# Altium PCB PCB1.PcbDoc (part 2 of 3)
Units mil, origin at the board's own origin, x right, y up, seen from the top; angles counter-clockwise.
Board outline 2780 x 2325 mil, 2 copper layers (Top Layer, Bottom Layer); 78 components, 66 nets, 284 pads, 83 vias.
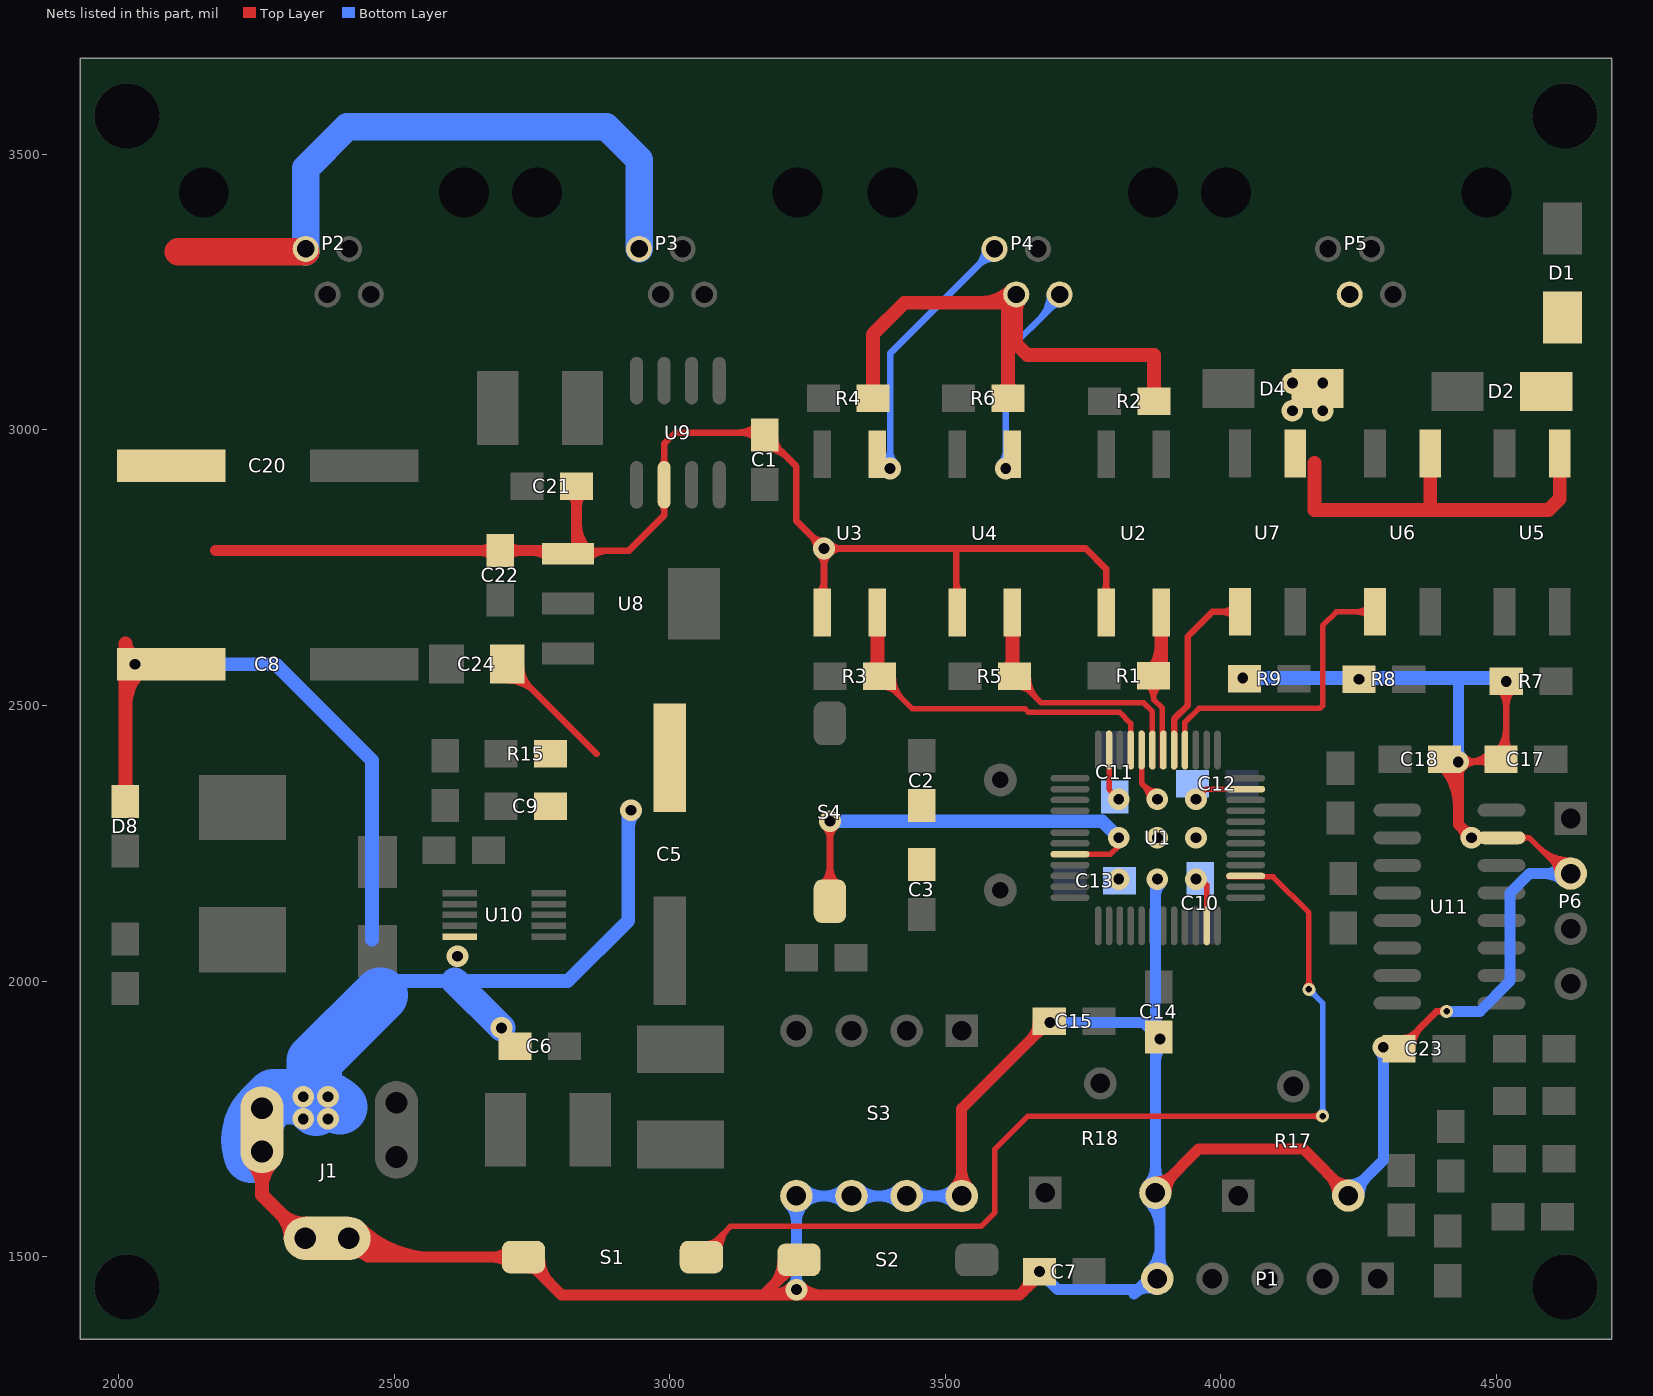
[diagram p2: the nets of this part, all layers, seen from the top]

## Via types
v1: diameter 39.37, hole 19.68, Top Layer to Bottom Layer, 56 vias
v2: diameter 23.62, hole 11.81, Top Layer to Bottom Layer, 18 vias
v3: diameter 19.68, hole 11.81, Top Layer to Bottom Layer, 8 vias
v4: diameter 23.62, hole 11.81, Top Layer to Bottom Layer, tented bottom, 1 vias

## Nets (pads, with @x,y where several pads share a name; then routed paths per layer and width w, separated by ;. In a path a pad name is that pad's centre, name@x,y a point inside that pad or via, vN(x,y) a via of type N, cw(c..) or ccw(c..) an arc to the next point about the centre after c; other vN are vias at no path point) (continued)
GND: C1.2 C2.2 C3.2 C5.2 C6.1 C7.1 C8.2 C9.1 C10.2 C11.2 C12.2 C13.2 C14.2 C15.2 C17.2 C18.2 C20.2 C21.2 C22.2 C23.2 C24.2 D8.2 J1.2 J1.2A J1.2B J1.3 J1.3A J1.3B P1.5 P2.2 P3.2 P6.2 R7.1 R8.1 R9.1 R15.1 R17.2 R18.2 S1.2 S2.2 S3.5 S3.6 S3.7 S3.8 S4.2 U1.8 U1.23 U1.35 U1.44 U1.47 U2.3 U3.3 U4.3 U8.1 U9.2 U10.5 U11.15 | length 31833.9
  Top Layer w10: U1.8@3726.41,2230.16 3799.84,2230.16 v1@3815,2245.32 ; U1.47@3797.28,2450 3797.28,2347.72 v1(3815,2330) ; U1.44@3856.33,2450 3856.33,2358.67 v1(3885,2330) ; v1(3955,2330) 3973.27,2348.27 U1.35@4075,2348.27 ; U1.23@3974.44,2100.24 3974.44,2174.44 ; C18.2@4431.52,2397.31 C17.2@4533.86,2397.31 ; U11.15@4509.49,2260 4560,2260 P6.2@4615,2205 ; 3859.93,2355.07 cw(c3834.86,2330) v1@3870.31,2330 ; 3859.93,2355.07 ccw(c3885,2380.14) v1@3885,2344.69 ; 3859.93,2355.07 ccw(c3885,2380.14) v1@3885,2344.69 ; 3859.93,2355.07 cw(c3834.86,2330) v1@3870.31,2330 ; 3859.93,2355.07 ccw(c3885,2380.14) v1@3885,2344.69 ; 3859.93,2355.07 cw(c3834.86,2330) v1@3870.31,2330 ; C18.2@4418.21,2409.76 ccw(c4448.26,2439.8) v1@4448.26,2397.31 ; C18.2@4418.21,2409.76 ccw(c4448.26,2439.8) v1@4448.26,2397.31 ; C18.2@4418.21,2409.76 ccw(c4448.26,2439.8) v1@4448.26,2397.31 ; C18.2@4425.28,2388.55 cw(c4446.45,2367.38) v1@4446.45,2397.31 ; C18.2@4425.28,2388.55 cw(c4446.45,2367.38) v1@4446.45,2397.31 ; C18.2@4425.28,2388.55 cw(c4446.45,2367.38) v1@4446.45,2397.31 ; C18.2@4425.28,2416.83 ccw(c4472.4,2463.95) 4472.4,2397.31 ; C18.2@4425.28,2416.83 ccw(c4472.4,2463.95) 4472.4,2397.31 ; C18.2@4425.28,2416.83 ccw(c4472.4,2463.95) 4472.4,2397.31 ; v1@4441.53,2387.3 cw(c4465.69,2363.14) 4465.69,2397.31 ; v1@4441.53,2387.3 cw(c4465.69,2363.14) 4465.69,2397.31 ; v1@4441.53,2387.3 cw(c4465.69,2363.14) 4465.69,2397.31 ; v1@4441.53,2408.07 ccw(c4467.5,2434.04) 4467.5,2397.31 ; v1@4441.53,2408.07 ccw(c4467.5,2434.04) 4467.5,2397.31 ; v1@4441.53,2408.07 ccw(c4467.5,2434.04) 4467.5,2397.31 ; v1@4443.5,2397.31 ccw(c4443.5,2462.67) C17.2@4489.72,2416.45 ; v1@4443.5,2397.31 ccw(c4443.5,2462.67) C17.2@4489.72,2416.45 ; v1@4443.5,2397.31 ccw(c4443.5,2462.67) C17.2@4489.72,2416.45 ; 4467.65,2397.31 cw(c4467.65,2366.1) C17.2@4489.72,2388.17 ; 4467.65,2397.31 ccw(c4467.65,2438.53) C17.2@4496.79,2409.38 ; 4467.65,2397.31 ccw(c4467.65,2438.53) C17.2@4496.79,2409.38 ; 4467.65,2397.31 cw(c4467.65,2366.1) C17.2@4489.72,2388.17 ; 4467.65,2397.31 ccw(c4467.65,2438.53) C17.2@4496.79,2409.38 ; 4467.65,2397.31 cw(c4467.65,2366.1) C17.2@4489.72,2388.17 ; U11.15@4545.8,2255.18 cw(c4557.43,2243.56) 4557.43,2260 ; U11.15@4545.8,2255.18 cw(c4557.43,2243.56) 4557.43,2260 ; U11.15@4545.8,2255.18 cw(c4557.43,2243.56) 4557.43,2260 ; U11.15@4545.8,2264.82 ccw(c4557.43,2276.44) 4557.43,2260 ; U11.15@4545.8,2264.82 ccw(c4557.43,2276.44) 4557.43,2260 ; U11.15@4545.8,2264.82 ccw(c4557.43,2276.44) 4557.43,2260 ; 4576.06,2243.94 ccw(c4635,2302.88) P6.2@4635,2219.53 ; 4576.06,2243.94 ccw(c4635,2302.88) P6.2@4635,2219.53 ; 4576.06,2243.94 ccw(c4635,2302.88) P6.2@4635,2219.53 ; 4593.13,2226.87 ccw(c4635,2268.74) P6.2@4635,2209.53 ; 4593.13,2226.87 ccw(c4635,2268.74) P6.2@4635,2209.53 ; 4593.13,2226.87 ccw(c4635,2268.74) P6.2@4635,2209.53 ; 4600.2,2219.8 cw(c4575.4,2195) P6.2@4610.47,2195 ; 4600.2,2219.8 cw(c4575.4,2195) P6.2@4610.47,2195 ; 4600.2,2219.8 cw(c4575.4,2195) P6.2@4610.47,2195
  Top Layer w12: C24.2@2705.12,2575 2867.81,2412.31 ; U8.1@2821.42,2781.14 2926.14,2781.14 2990,2845 U9.2@2990,2900.51 2990,2975 3010,2995 3168.45,2995 C1.2@3172.31,2991.14 3230,2933.45 3230,2835 v1(3280,2785) ; S4.2@3270.88,2149.78 S4.2@3301.8,2118.86 ; U3.3@3280,2671.6 v1(3280,2785) ; S4.2@3290.88,2144.78 v1(3290.88,2290) v1@3290.88,2295.88 ; U4.3@3520,2670.6 3520,2785 ; U2.3@3792,2668.6 3792,2748 3755,2785 3520,2785 ; C23.2@4323.86,1877.31 4391.55,1945 v2(4410,1945) ; C17.2@4518.14,2411.6 v1(4518.14,2543.69) ; C24.2@2705.12,2545.57 cw(c2705.12,2474.51) 2755.36,2524.75 ; C24.2@2705.12,2545.57 cw(c2705.12,2474.51) 2755.36,2524.75 ; C24.2@2705.12,2545.57 cw(c2705.12,2474.51) 2755.36,2524.75 ; C24.2@2705.12,2557.57 cw(c2705.12,2515.48) C24.2@2734.88,2545.24 ; C24.2@2705.12,2557.57 cw(c2705.12,2515.48) C24.2@2734.88,2545.24 ; C24.2@2705.12,2557.57 cw(c2705.12,2515.48) C24.2@2734.88,2545.24 ; C24.2@2730.61,2571.06 ccw(c2782.66,2571.06) 2745.86,2534.26 ; C24.2@2730.61,2571.06 ccw(c2782.66,2571.06) 2745.86,2534.26 ; C24.2@2730.61,2571.06 ccw(c2782.66,2571.06) 2745.86,2534.26 ; U8.1@2853.06,2765.87 cw(c2889.92,2729.02) 2889.92,2781.14 ; U8.1@2853.06,2765.87 cw(c2889.92,2729.02) 2889.92,2781.14 ; U8.1@2853.06,2765.87 cw(c2889.92,2729.02) 2889.92,2781.14 ; U8.1@2853.06,2785.23 ccw(c2862.93,2795.09) U8.1@2862.93,2781.14 ; U8.1@2853.06,2785.23 ccw(c2862.93,2795.09) U8.1@2862.93,2781.14 ; U8.1@2853.06,2785.23 ccw(c2862.93,2795.09) U8.1@2862.93,2781.14 ; U9.2@2985.89,2864.91 cw(c2975.97,2854.99) 2990,2854.99 ; U9.2@2985.89,2864.91 cw(c2975.97,2854.99) 2990,2854.99 ; U9.2@2985.89,2864.91 cw(c2975.97,2854.99) 2990,2854.99 ; U9.2@2985.89,2936.12 ccw(c2975.97,2946.04) 2990,2946.04 ; U9.2@2985.89,2936.12 ccw(c2975.97,2946.04) 2990,2946.04 ; U9.2@2985.89,2936.12 ccw(c2975.97,2946.04) 2990,2946.04 ; 2990,2854.99 cw(c3004.03,2854.99) U9.2@2994.11,2864.91 ; 2990,2854.99 cw(c3004.03,2854.99) U9.2@2994.11,2864.91 ; 2990,2854.99 cw(c3004.03,2854.99) U9.2@2994.11,2864.91 ; 2990,2946.04 ccw(c3004.03,2946.04) U9.2@2994.11,2936.12 ; 2990,2946.04 ccw(c3004.03,2946.04) U9.2@2994.11,2936.12 ; 2990,2946.04 ccw(c3004.03,2946.04) U9.2@2994.11,2936.12 ; 3123.69,2995 ccw(c3123.69,3044.77) C1.2@3158.88,3009.58 ; 3123.69,2995 ccw(c3123.69,3044.77) C1.2@3158.88,3009.58 ; 3123.69,2995 ccw(c3123.69,3044.77) C1.2@3158.88,3009.58 ; 3129.2,2995 cw(c3129.2,2953.03) C1.2@3158.88,2982.71 ; 3129.2,2995 cw(c3129.2,2953.03) C1.2@3158.88,2982.71 ; 3129.2,2995 cw(c3129.2,2953.03) C1.2@3158.88,2982.71 ; C1.2@3172.31,2967.14 cw(c3172.31,2909.2) 3213.28,2950.17 ; C1.2@3172.31,2967.14 cw(c3172.31,2909.2) 3213.28,2950.17 ; C1.2@3172.31,2967.14 cw(c3172.31,2909.2) 3213.28,2950.17 ; C1.2@3172.31,2979.14 cw(c3172.31,2950.17) C1.2@3192.8,2970.66 ; C1.2@3172.31,2979.14 cw(c3172.31,2950.17) C1.2@3192.8,2970.66 ; C1.2@3172.31,2979.14 cw(c3172.31,2950.17) C1.2@3192.8,2970.66 ; C1.2@3191.31,2986.14 ccw(c3225.11,2986.14) 3201.21,2962.24 ; C1.2@3191.31,2986.14 ccw(c3225.11,2986.14) 3201.21,2962.24 ; C1.2@3191.31,2986.14 ccw(c3225.11,2986.14) 3201.21,2962.24 ; 3256.64,2808.36 cw(c3233.28,2785) v1@3266.32,2785 ; 3256.64,2808.36 ccw(c3280,2831.72) v1@3280,2798.68 ; 3256.64,2808.36 ccw(c3280,2831.72) v1@3280,2798.68 ; 3256.64,2808.36 cw(c3233.28,2785) v1@3266.32,2785 ; 3256.64,2808.36 ccw(c3280,2831.72) v1@3280,2798.68 ; 3256.64,2808.36 cw(c3233.28,2785) v1@3266.32,2785 ; U3.3@3270.11,2703.05 ccw(c3246.22,2726.93) 3280,2726.93 ; U3.3@3270.11,2703.05 ccw(c3246.22,2726.93) 3280,2726.93 ; U3.3@3270.11,2703.05 ccw(c3246.22,2726.93) 3280,2726.93 ; v1@3270.32,2775.32 cw(c3246.96,2751.96) 3280,2751.96 ; v1@3270.32,2775.32 cw(c3246.96,2751.96) 3280,2751.96 ; v1@3270.32,2775.32 cw(c3246.96,2751.96) 3280,2751.96 ; S4.2@3274.25,2171.26 ccw(c3234.08,2211.42) 3290.88,2211.42 ; S4.2@3274.25,2171.26 ccw(c3234.08,2211.42) 3290.88,2211.42 ; S4.2@3274.25,2171.26 ccw(c3234.08,2211.42) 3290.88,2211.42 ; 3280,2712.45 ccw(c3293.29,2712.45) U3.3@3283.89,2703.05 ; 3280,2712.45 ccw(c3293.29,2712.45) U3.3@3283.89,2703.05 ; 3280,2712.45 ccw(c3293.29,2712.45) U3.3@3283.89,2703.05 ; 3280,2751.96 cw(c3313.04,2751.96) v1@3289.68,2775.32 ; 3280,2751.96 cw(c3313.04,2751.96) v1@3289.68,2775.32 ; 3280,2751.96 cw(c3313.04,2751.96) v1@3289.68,2775.32 ; v1(3280,2785) 3520,2785 ; v1@3281.21,2280.32 cw(c3257.84,2256.96) 3290.88,2256.96 ; v1@3281.21,2280.32 cw(c3257.84,2256.96) 3290.88,2256.96 ; v1@3281.21,2280.32 cw(c3257.84,2256.96) 3290.88,2256.96 ; v1@3289.68,2775.32 cw(c3313.04,2751.96) 3313.04,2785 ; v1@3289.68,2775.32 cw(c3313.04,2751.96) 3313.04,2785 ; v1@3289.68,2775.32 cw(c3313.04,2751.96) 3313.04,2785 ; v1@3289.68,2794.68 ccw(c3313.04,2818.04) 3313.04,2785 ; v1@3289.68,2794.68 ccw(c3313.04,2818.04) 3313.04,2785 ; v1@3289.68,2794.68 ccw(c3313.04,2818.04) 3313.04,2785 ; 3290.88,2211.42 ccw(c3347.68,2211.42) S4.2@3307.52,2171.26 ; 3290.88,2211.42 ccw(c3347.68,2211.42) S4.2@3307.52,2171.26 ; 3290.88,2211.42 ccw(c3347.68,2211.42) S4.2@3307.52,2171.26 ; 3290.88,2256.96 cw(c3323.92,2256.96) v1@3300.56,2280.32 ; 3290.88,2256.96 cw(c3323.92,2256.96) v1@3300.56,2280.32 ; 3290.88,2256.96 cw(c3323.92,2256.96) v1@3300.56,2280.32 ; U4.3@3515.11,2703.05 ccw(c3503.29,2714.86) 3520,2714.86 ; U4.3@3515.11,2703.05 ccw(c3503.29,2714.86) 3520,2714.86 ; U4.3@3515.11,2703.05 ccw(c3503.29,2714.86) 3520,2714.86 ; 3520,2724.52 ccw(c3550.36,2724.52) U4.3@3528.89,2703.05 ; 3520,2724.52 ccw(c3550.36,2724.52) U4.3@3528.89,2703.05 ; 3520,2724.52 ccw(c3550.36,2724.52) U4.3@3528.89,2703.05 ; U2.3@3785.11,2703.05 ccw(c3768.47,2719.69) 3792,2719.69 ; U2.3@3785.11,2703.05 ccw(c3768.47,2719.69) 3792,2719.69 ; U2.3@3785.11,2703.05 ccw(c3768.47,2719.69) 3792,2719.69 ; 3792,2719.69 ccw(c3815.53,2719.69) U2.3@3798.89,2703.05 ; 3792,2719.69 ccw(c3815.53,2719.69) U2.3@3798.89,2703.05 ; 3792,2719.69 ccw(c3815.53,2719.69) U2.3@3798.89,2703.05 ; C23.2@4328.86,1896.31 ccw(c4328.86,1930.11) 4352.76,1906.21 ; C23.2@4328.86,1896.31 ccw(c4328.86,1930.11) 4352.76,1906.21 ; C23.2@4328.86,1896.31 ccw(c4328.86,1930.11) 4352.76,1906.21 ; C23.2@4335.86,1877.31 cw(c4364.83,1877.31) C23.2@4344.34,1897.8 ; C23.2@4335.86,1877.31 cw(c4364.83,1877.31) C23.2@4344.34,1897.8 ; C23.2@4335.86,1877.31 cw(c4364.83,1877.31) C23.2@4344.34,1897.8 ; C23.2@4347.86,1877.31 cw(c4405.8,1877.31) 4364.83,1918.28 ; C23.2@4347.86,1877.31 cw(c4405.8,1877.31) 4364.83,1918.28 ; C23.2@4347.86,1877.31 cw(c4405.8,1877.31) 4364.83,1918.28 ; 4395.97,1945 cw(c4395.97,1930.97) v2@4405.89,1940.89 ; 4395.97,1945 ccw(c4395.97,1959.03) v2@4405.89,1949.11 ; 4395.97,1945 ccw(c4395.97,1959.03) v2@4405.89,1949.11 ; 4395.97,1945 cw(c4395.97,1930.97) v2@4405.89,1940.89 ; 4395.97,1945 ccw(c4395.97,1959.03) v2@4405.89,1949.11 ; 4395.97,1945 cw(c4395.97,1930.97) v2@4405.89,1940.89 ; C17.2@4500.42,2415.75 ccw(c4457.65,2458.52) 4518.14,2458.52 ; C17.2@4500.42,2415.75 ccw(c4457.65,2458.52) 4518.14,2458.52 ; C17.2@4500.42,2415.75 ccw(c4457.65,2458.52) 4518.14,2458.52 ; R7.1@4504.71,2530.25 cw(c4472.27,2497.82) 4518.14,2497.82 ; R7.1@4504.71,2530.25 cw(c4472.27,2497.82) 4518.14,2497.82 ; R7.1@4504.71,2530.25 cw(c4472.27,2497.82) 4518.14,2497.82 ; R7.1@4508.47,2534.01 cw(c4485.1,2510.65) 4518.14,2510.65 ; R7.1@4508.47,2534.01 cw(c4485.1,2510.65) 4518.14,2510.65 ; R7.1@4508.47,2534.01 cw(c4485.1,2510.65) 4518.14,2510.65 ; C17.2@4508.91,2407.26 ccw(c4486.62,2429.55) 4518.14,2429.55 ; C17.2@4508.91,2407.26 ccw(c4486.62,2429.55) 4518.14,2429.55 ; C17.2@4508.91,2407.26 ccw(c4486.62,2429.55) 4518.14,2429.55 ; 4518.14,2437.84 ccw(c4549.39,2437.84) C17.2@4527.29,2415.75 ; 4518.14,2437.84 ccw(c4549.39,2437.84) C17.2@4527.29,2415.75 ; 4518.14,2437.84 ccw(c4549.39,2437.84) C17.2@4527.29,2415.75 ; 4518.14,2497.82 cw(c4564.01,2497.82) R7.1@4531.58,2530.25 ; 4518.14,2497.82 cw(c4564.01,2497.82) R7.1@4531.58,2530.25 ; 4518.14,2497.82 cw(c4564.01,2497.82) R7.1@4531.58,2530.25 ; 4518.14,2510.65 cw(c4551.18,2510.65) R7.1@4527.82,2534.01 ; 4518.14,2510.65 cw(c4551.18,2510.65) R7.1@4527.82,2534.01 ; 4518.14,2510.65 cw(c4551.18,2510.65) R7.1@4527.82,2534.01
  Top Layer w20: 2176.14,2781.14 C22.2@2692.31,2781.14 2821.42,2781.14 2831.14,2790.87 C21.2@2831.14,2897.69 ; J1.3A@2339.02,1533.15 J1.3@2378.39,1533.15 ; S2.2@3234.78,1494.12 3170.66,1430 ; S3.8@3530,1610 3530,1768.45 C15.2@3688.86,1927.31 ; C7.1@3672.69,1467.69 3635,1430 3170.66,1430 ; R18.2@3881.57,1630.75 3895.75,1630.75 3960,1695 4150,1695 R17.2@4232.91,1612.09 ; v1(4431.14,2397.69) 4431.14,2283.86 v1(4455,2260) ; J1.3A@2352.82,1519.34 cw(c2386.16,1486.01) J1.3@2386.16,1533.15 ; J1.3A@2352.82,1519.34 cw(c2386.16,1486.01) J1.3@2386.16,1533.15 ; J1.3A@2352.82,1519.34 cw(c2386.16,1486.01) J1.3@2386.16,1533.15 ; J1.3A@2352.82,1546.96 ccw(c2386.16,1580.29) J1.3@2386.16,1533.15 ; J1.3A@2352.82,1546.96 ccw(c2386.16,1580.29) J1.3@2386.16,1533.15 ; J1.3A@2352.82,1546.96 ccw(c2386.16,1580.29) J1.3@2386.16,1533.15 ; J1.3A@2354.56,1521.33 cw(c2378.38,1503.23) J1.3@2378.39,1533.15 ; J1.3A@2354.56,1521.33 cw(c2378.38,1503.23) J1.3@2378.39,1533.15 ; J1.3A@2354.56,1521.33 cw(c2378.38,1503.23) J1.3@2378.39,1533.15 ; J1.3A@2354.56,1521.33 cw(c2378.38,1503.23) J1.3@2378.39,1533.15 ; J1.3A@2354.56,1521.33 cw(c2378.38,1503.23) J1.3@2378.39,1533.15 ; J1.3A@2354.56,1521.33 cw(c2378.38,1503.23) J1.3@2378.39,1533.15 ; J1.3A@2354.56,1544.97 ccw(c2378.38,1563.07) J1.3@2378.39,1533.15 ; J1.3A@2354.56,1544.97 ccw(c2378.38,1563.07) J1.3@2378.39,1533.15 ; J1.3A@2354.56,1544.97 ccw(c2378.38,1563.07) J1.3@2378.39,1533.15 ; J1.3A@2354.56,1544.97 ccw(c2378.38,1563.07) J1.3@2378.39,1533.15 ; J1.3A@2354.56,1544.97 ccw(c2378.38,1563.07) J1.3@2378.39,1533.15 ; J1.3A@2354.56,1544.97 ccw(c2378.38,1563.07) J1.3@2378.39,1533.15 ; J1.3@2370.61,1533.15 cw(c2370.61,1486.01) J1.3B@2403.95,1519.34 ; J1.3@2370.61,1533.15 ccw(c2370.61,1580.29) J1.3B@2403.95,1546.96 ; J1.3@2370.61,1533.15 ccw(c2370.61,1580.29) J1.3B@2403.95,1546.96 ; J1.3@2370.61,1533.15 cw(c2370.61,1486.01) J1.3B@2403.95,1519.34 ; J1.3@2370.61,1533.15 ccw(c2370.61,1580.29) J1.3B@2403.95,1546.96 ; J1.3@2370.61,1533.15 cw(c2370.61,1486.01) J1.3B@2403.95,1519.34 ; J1.3@2378.39,1533.15 cw(c2378.39,1503.23) J1.3B@2402.21,1521.33 ; J1.3@2378.39,1533.15 ccw(c2378.39,1563.07) J1.3B@2402.21,1544.97 ; J1.3@2378.39,1533.15 cw(c2378.39,1503.23) J1.3B@2402.21,1521.33 ; J1.3@2378.39,1533.15 ccw(c2378.39,1563.07) J1.3B@2402.21,1544.97 ; J1.3@2378.39,1533.15 ccw(c2378.39,1563.07) J1.3B@2402.21,1544.97 ; J1.3@2378.39,1533.15 cw(c2378.39,1503.23) J1.3B@2402.21,1521.33 ; J1.3@2378.39,1533.15 ccw(c2378.39,1563.07) J1.3B@2402.21,1544.97 ; J1.3@2378.39,1533.15 cw(c2378.39,1503.23) J1.3B@2402.21,1521.33 ; J1.3@2378.39,1533.15 ccw(c2378.39,1563.07) J1.3B@2402.21,1544.97 ; J1.3@2378.39,1533.15 cw(c2378.39,1503.23) J1.3B@2402.21,1521.33 ; J1.3@2378.39,1533.15 ccw(c2378.39,1563.07) J1.3B@2402.21,1544.97 ; J1.3@2378.39,1533.15 cw(c2378.39,1503.23) J1.3B@2402.21,1521.33 ; J1.3@2378.39,1533.15 J1.3B@2417.76,1533.15 2451.79,1499.12 S1.2@2734.78,1499.12 2803.9,1430 3170.66,1430 ; J1.3B@2410.24,1525.63 ccw(c2474.25,1589.65) 2474.25,1499.12 ; J1.3B@2410.24,1525.63 ccw(c2474.25,1589.65) 2474.25,1499.12 ; J1.3B@2410.24,1525.63 ccw(c2474.25,1589.65) 2474.25,1499.12 ; J1.3B@2417.76,1513.62 cw(c2417.76,1466.48) 2451.09,1499.81 ; J1.3B@2417.76,1513.62 cw(c2417.76,1466.48) 2451.09,1499.81 ; J1.3B@2417.76,1513.62 cw(c2417.76,1466.48) 2451.09,1499.81 ; J1.3B@2424.38,1539.78 ccw(c2522.54,1637.93) 2522.54,1499.12 ; J1.3B@2424.38,1539.78 ccw(c2522.54,1637.93) 2522.54,1499.12 ; J1.3B@2424.38,1539.78 ccw(c2522.54,1637.93) 2522.54,1499.12 ; J1.3B@2437.28,1533.15 ccw(c2484.43,1533.15) 2451.09,1499.81 ; J1.3B@2437.28,1533.15 ccw(c2484.43,1533.15) 2451.09,1499.81 ; J1.3B@2437.28,1533.15 ccw(c2484.43,1533.15) 2451.09,1499.81 ; J1.3B@2438.52,1553.92 ccw(c2570.82,1686.21) 2570.82,1499.12 ; J1.3B@2438.52,1553.92 ccw(c2570.82,1686.21) 2570.82,1499.12 ; J1.3B@2438.52,1553.92 ccw(c2570.82,1686.21) 2570.82,1499.12 ; 2656.1,2781.14 cw(c2656.1,2744.93) C22.2@2681.71,2770.54 ; 2656.1,2781.14 ccw(c2656.1,2817.36) C22.2@2681.71,2791.75 ; 2656.1,2781.14 ccw(c2656.1,2817.36) C22.2@2681.71,2791.75 ; 2656.1,2781.14 cw(c2656.1,2744.93) C22.2@2681.71,2770.54 ; 2656.1,2781.14 ccw(c2656.1,2817.36) C22.2@2681.71,2791.75 ; 2656.1,2781.14 cw(c2656.1,2744.93) C22.2@2681.71,2770.54 ; 2677.79,1499.12 cw(c2677.79,1451.97) S1.2@2711.13,1485.31 ; 2677.79,1499.12 ccw(c2677.79,1546.26) S1.2@2711.13,1512.93 ; 2677.79,1499.12 ccw(c2677.79,1546.26) S1.2@2711.13,1512.93 ; 2677.79,1499.12 cw(c2677.79,1451.97) S1.2@2711.13,1485.31 ; 2677.79,1499.12 ccw(c2677.79,1546.26) S1.2@2711.13,1512.93 ; 2677.79,1499.12 cw(c2677.79,1451.97) S1.2@2711.13,1485.31 ; C22.2@2702.92,2770.54 cw(c2728.53,2744.93) 2728.53,2781.14 ; C22.2@2702.92,2770.54 cw(c2728.53,2744.93) 2728.53,2781.14 ; C22.2@2702.92,2770.54 cw(c2728.53,2744.93) 2728.53,2781.14 ; C22.2@2702.92,2791.75 ccw(c2728.53,2817.36) 2728.53,2781.14 ; C22.2@2702.92,2791.75 ccw(c2728.53,2817.36) 2728.53,2781.14 ; C22.2@2702.92,2791.75 ccw(c2728.53,2817.36) 2728.53,2781.14 ; S1.2@2744.62,1479.59 cw(c2744.62,1456.21) S1.2@2761.16,1472.74 ; S1.2@2744.62,1479.59 cw(c2744.62,1456.21) S1.2@2761.16,1472.74 ; S1.2@2744.62,1479.59 cw(c2744.62,1456.21) S1.2@2761.16,1472.74 ; 2751.39,2781.14 cw(c2751.39,2738.67) U8.1@2781.42,2768.7 ; 2751.39,2781.14 cw(c2751.39,2738.67) U8.1@2781.42,2768.7 ; 2751.39,2781.14 cw(c2751.39,2738.67) U8.1@2781.42,2768.7 ; S1.2@2764.15,1499.12 ccw(c2835.06,1499.12) 2784.92,1448.98 ; S1.2@2764.15,1499.12 ccw(c2835.06,1499.12) 2784.92,1448.98 ; S1.2@2764.15,1499.12 ccw(c2835.06,1499.12) 2784.92,1448.98 ; C21.2@2820.54,2887.08 cw(c2794.93,2861.47) 2831.14,2861.47 ; C21.2@2820.54,2887.08 cw(c2794.93,2861.47) 2831.14,2861.47 ; C21.2@2820.54,2887.08 cw(c2794.93,2861.47) 2831.14,2861.47 ; 2831.14,2828.49 ccw(c2896.33,2828.49) U8.1@2850.23,2782.4 ; 2831.14,2828.49 ccw(c2896.33,2828.49) U8.1@2850.23,2782.4 ; 2831.14,2828.49 ccw(c2896.33,2828.49) U8.1@2850.23,2782.4 ; 2831.14,2861.47 cw(c2867.36,2861.47) C21.2@2841.75,2887.08 ; 2831.14,2861.47 cw(c2867.36,2861.47) C21.2@2841.75,2887.08 ; 2831.14,2861.47 cw(c2867.36,2861.47) C21.2@2841.75,2887.08 ; 3182.48,1430 ccw(c3182.48,1487.52) v1@3223.15,1446.85 ; 3182.48,1430 ccw(c3182.48,1487.52) v1@3223.15,1446.85 ; 3182.48,1430 ccw(c3182.48,1487.52) v1@3223.15,1446.85 ; 3184.64,1443.98 ccw(c3134.5,1494.12) S2.2@3205.41,1494.12 ; 3184.64,1443.98 ccw(c3134.5,1494.12) S2.2@3205.41,1494.12 ; 3184.64,1443.98 ccw(c3134.5,1494.12) S2.2@3205.41,1494.12 ; S2.2@3208.4,1467.74 cw(c3224.94,1451.21) S2.2@3224.94,1474.59 ; S2.2@3208.4,1467.74 cw(c3224.94,1451.21) S2.2@3224.94,1474.59 ; S2.2@3208.4,1467.74 cw(c3224.94,1451.21) S2.2@3224.94,1474.59 ; v1@3236.85,1446.85 ccw(c3277.52,1487.52) 3277.52,1430 ; v1@3236.85,1446.85 ccw(c3277.52,1487.52) 3277.52,1430 ; v1@3236.85,1446.85 ccw(c3277.52,1487.52) 3277.52,1430 ; S3.8@3516.19,1623.81 ccw(c3482.86,1657.14) 3530,1657.14 ; S3.8@3516.19,1623.81 ccw(c3482.86,1657.14) 3530,1657.14 ; S3.8@3516.19,1623.81 ccw(c3482.86,1657.14) 3530,1657.14 ; 3530,1657.14 ccw(c3577.14,1657.14) S3.8@3543.81,1623.81 ; 3530,1657.14 ccw(c3577.14,1657.14) S3.8@3543.81,1623.81 ; 3530,1657.14 ccw(c3577.14,1657.14) S3.8@3543.81,1623.81 ; 3640.77,1435.77 ccw(c3613.59,1462.96) C7.1@3651.39,1469.96 ; 3640.77,1435.77 ccw(c3613.59,1462.96) C7.1@3651.39,1469.96 ; 3640.77,1435.77 ccw(c3613.59,1462.96) C7.1@3651.39,1469.96 ; 3649.98,1444.98 ccw(c3622.27,1472.69) C7.1@3661.46,1472.69 ; 3649.98,1444.98 ccw(c3622.27,1472.69) C7.1@3661.46,1472.69 ; 3649.98,1444.98 ccw(c3622.27,1472.69) C7.1@3661.46,1472.69 ; 3654.72,1893.17 ccw(c3620.57,1927.31) C15.2@3668.86,1927.31 ; 3654.72,1893.17 ccw(c3620.57,1927.31) C15.2@3668.86,1927.31 ; 3654.72,1893.17 ccw(c3620.57,1927.31) C15.2@3668.86,1927.31 ; C15.2@3666.79,1905.24 cw(c3683.86,1888.17) C15.2@3683.86,1912.31 ; C15.2@3666.79,1905.24 cw(c3683.86,1888.17) C15.2@3683.86,1912.31 ; C15.2@3666.79,1905.24 cw(c3683.86,1888.17) C15.2@3683.86,1912.31 ; C15.2@3667.57,1906.02 cw(c3690,1883.59) C15.2@3690,1915.32 ; C15.2@3667.57,1906.02 cw(c3690,1883.59) C15.2@3690,1915.32 ; C15.2@3667.57,1906.02 cw(c3690,1883.59) C15.2@3690,1915.32 ; C18.2@4400.54,2392.08 cw(c4326.64,2318.19) 4431.14,2318.19 ; C18.2@4400.54,2392.08 cw(c4326.64,2318.19) 4431.14,2318.19 ; C18.2@4400.54,2392.08 cw(c4326.64,2318.19) 4431.14,2318.19 ; C18.2@4414.68,2406.22 cw(c4374.93,2366.47) 4431.14,2366.47 ; C18.2@4414.68,2406.22 cw(c4374.93,2366.47) 4431.14,2366.47 ; C18.2@4414.68,2406.22 cw(c4374.93,2366.47) 4431.14,2366.47 ; C18.2@4424.29,2390.84 cw(c4407.76,2374.31) 4431.14,2374.31 ; C18.2@4424.29,2390.84 cw(c4407.76,2374.31) 4431.14,2374.31 ; C18.2@4424.29,2390.84 cw(c4407.76,2374.31) 4431.14,2374.31 ; 4431.14,2374.31 cw(c4454.52,2374.31) v1@4437.99,2390.84 ; 4431.14,2374.31 cw(c4454.52,2374.31) v1@4437.99,2390.84 ; 4431.14,2374.31 cw(c4454.52,2374.31) v1@4437.99,2390.84 ; 4438.47,2276.53 cw(c4421.93,2260) v1@4445.31,2260 ; 4438.47,2276.53 ccw(c4455,2293.07) v1@4455,2269.68 ; 4438.47,2276.53 ccw(c4455,2293.07) v1@4455,2269.68 ; 4438.47,2276.53 cw(c4421.93,2260) v1@4445.31,2260 ; 4438.47,2276.53 ccw(c4455,2293.07) v1@4455,2269.68 ; 4438.47,2276.53 cw(c4421.93,2260) v1@4445.31,2260 ; R18.2@3881.57,1635.28 ccw(c3881.57,1680.42) 3913.5,1648.5 cw(c3881.57,1680.42) R18.2@3881.57,1635.28 ; R18.2@3901.1,1615.75 cw(c3950.24,1615.75) 3915.49,1650.49 ccw(c3950.24,1615.75) R18.2@3901.1,1615.75 ; 4196.35,1648.65 cw(c4158.44,1610.75) 4212.05,1610.75 ccw(c4158.44,1610.75) 4196.35,1648.65 ; 4202.81,1642.19 ccw(c4231.57,1670.96) 4231.57,1630.28 cw(c4231.57,1670.96) 4202.81,1642.19
  Top Layer w25: D8.2@2012.31,2326.14 2012.31,2612.69 ; J1.2B@2260.28,1769.37 J1.2@2260.28,1730 ; J1.3A@2339.02,1533.15 2260.28,1611.89 J1.2A@2260.28,1690.63 J1.2@2260.28,1730 ; D8.2@2003.47,2339.98 ccw(c1982.14,2361.32) 2012.31,2361.32 ; D8.2@2003.47,2339.98 ccw(c1982.14,2361.32) 2012.31,2361.32 ; D8.2@2003.47,2339.98 ccw(c1982.14,2361.32) 2012.31,2361.32 ; 2012.31,2361.32 ccw(c2042.49,2361.32) D8.2@2021.15,2339.98 ; 2012.31,2361.32 ccw(c2042.49,2361.32) D8.2@2021.15,2339.98 ; 2012.31,2361.32 ccw(c2042.49,2361.32) D8.2@2021.15,2339.98 ; 2012.31,2498.19 cw(c2103.92,2498.19) C8.2@2039.14,2562.96 ; 2012.31,2498.19 cw(c2103.92,2498.19) C8.2@2039.14,2562.96 ; 2012.31,2498.19 cw(c2103.92,2498.19) C8.2@2039.14,2562.96 ; 2012.31,2514.95 cw(c2090.05,2514.95) C8.2@2035.08,2569.92 ; 2012.31,2514.95 cw(c2090.05,2514.95) C8.2@2035.08,2569.92 ; 2012.31,2514.95 cw(c2090.05,2514.95) C8.2@2035.08,2569.92 ; 2012.31,2612.69 ccw(c2046.11,2612.69) C8.2@2032.82,2581.61 ; 2012.31,2612.69 ccw(c2033.51,2612.69) C8.2@2029.96,2591.79 ; 2012.31,2612.69 ccw(c2033.51,2612.69) C8.2@2029.96,2591.79 ; 2012.31,2612.69 ccw(c2046.11,2612.69) C8.2@2032.82,2581.61 ; 2012.31,2612.69 ccw(c2033.51,2612.69) C8.2@2029.96,2591.79 ; 2012.31,2612.69 ccw(c2046.11,2612.69) C8.2@2032.82,2581.61 ; J1.2A@2241.28,1671.63 cw(c2195.41,1625.76) 2260.28,1625.76 ; J1.2A@2241.28,1671.63 cw(c2195.41,1625.76) 2260.28,1625.76 ; J1.2A@2241.28,1671.63 cw(c2195.41,1625.76) 2260.28,1625.76 ; J1.2A@2248.24,1678.59 cw(c2219.17,1649.52) 2260.28,1649.52 ; J1.2A@2248.24,1678.59 cw(c2219.17,1649.52) 2260.28,1649.52 ; J1.2A@2248.24,1678.59 cw(c2219.17,1649.52) 2260.28,1649.52 ; J1.2A@2248.24,1702.67 ccw(c2219.17,1731.74) J1.2@2260.28,1731.74 ; J1.2A@2248.24,1702.67 ccw(c2219.17,1731.74) J1.2@2260.28,1731.74 ; J1.2A@2248.24,1702.67 ccw(c2219.17,1731.74) J1.2@2260.28,1731.74 ; J1.2B@2248.24,1757.33 cw(c2219.17,1728.26) J1.2@2260.28,1728.26 ; J1.2B@2248.24,1757.33 cw(c2219.17,1728.26) J1.2@2260.28,1728.26 ; J1.2B@2248.24,1757.33 cw(c2219.17,1728.26) J1.2@2260.28,1728.26 ; J1.2A@2248.61,1703.04 ccw(c2223.28,1730) J1.2@2260.28,1730 ; J1.2A@2248.61,1703.04 ccw(c2223.28,1730) J1.2@2260.28,1730 ; J1.2A@2248.61,1703.04 ccw(c2223.28,1730) J1.2@2260.28,1730 ; J1.2A@2248.61,1703.04 ccw(c2223.28,1730) J1.2@2260.28,1730 ; J1.2A@2248.61,1703.04 ccw(c2223.28,1730) J1.2@2260.28,1730 ; J1.2A@2248.61,1703.04 ccw(c2223.28,1730) J1.2@2260.28,1730 ; J1.2B@2248.61,1756.96 cw(c2223.28,1730) J1.2@2260.28,1730 ; J1.2B@2248.61,1756.96 cw(c2223.28,1730) J1.2@2260.28,1730 ; J1.2B@2248.61,1756.96 cw(c2223.28,1730) J1.2@2260.28,1730 ; J1.2B@2248.61,1756.96 cw(c2223.28,1730) J1.2@2260.28,1730 ; J1.2B@2248.61,1756.96 cw(c2223.28,1730) J1.2@2260.28,1730 ; J1.2B@2248.61,1756.96 cw(c2223.28,1730) J1.2@2260.28,1730 ; 2260.28,1625.76 cw(c2325.15,1625.76) J1.2A@2279.28,1671.63 ; 2260.28,1625.76 cw(c2325.15,1625.76) J1.2A@2279.28,1671.63 ; 2260.28,1625.76 cw(c2325.15,1625.76) J1.2A@2279.28,1671.63 ; 2260.28,1649.52 cw(c2301.38,1649.52) J1.2A@2272.32,1678.59 ; 2260.28,1649.52 cw(c2301.38,1649.52) J1.2A@2272.32,1678.59 ; 2260.28,1649.52 cw(c2301.38,1649.52) J1.2A@2272.32,1678.59 ; J1.2@2260.28,1728.26 cw(c2301.38,1728.26) J1.2B@2272.32,1757.33 ; J1.2@2260.28,1728.26 cw(c2301.38,1728.26) J1.2B@2272.32,1757.33 ; J1.2@2260.28,1728.26 cw(c2301.38,1728.26) J1.2B@2272.32,1757.33 ; J1.2@2260.28,1730 ccw(c2297.27,1730) J1.2A@2271.94,1703.04 ; J1.2@2260.28,1730 ccw(c2297.27,1730) J1.2A@2271.94,1703.04 ; J1.2@2260.28,1730 cw(c2297.27,1730) J1.2B@2271.94,1756.96 ; J1.2@2260.28,1730 cw(c2297.27,1730) J1.2B@2271.94,1756.96 ; J1.2@2260.28,1730 ccw(c2297.27,1730) J1.2A@2271.94,1703.04 ; J1.2@2260.28,1730 ccw(c2297.27,1730) J1.2A@2271.94,1703.04 ; J1.2@2260.28,1730 cw(c2297.27,1730) J1.2B@2271.94,1756.96 ; J1.2@2260.28,1730 cw(c2297.27,1730) J1.2B@2271.94,1756.96 ; J1.2@2260.28,1730 ccw(c2297.27,1730) J1.2A@2271.94,1703.04 ; J1.2@2260.28,1730 ccw(c2297.27,1730) J1.2A@2271.94,1703.04 ; J1.2@2260.28,1730 cw(c2297.27,1730) J1.2B@2271.94,1756.96 ; J1.2@2260.28,1730 cw(c2297.27,1730) J1.2B@2271.94,1756.96 ; J1.2@2260.28,1731.74 ccw(c2301.38,1731.74) J1.2A@2272.32,1702.67 ; J1.2@2260.28,1731.74 ccw(c2301.38,1731.74) J1.2A@2272.32,1702.67 ; J1.2@2260.28,1731.74 ccw(c2301.38,1731.74) J1.2A@2272.32,1702.67 ; 2293.15,1579.02 cw(c2247.28,1533.15) J1.3A@2312.15,1533.15 ; 2293.15,1579.02 ccw(c2339.02,1624.89) J1.3A@2339.02,1560.02 ; 2293.15,1579.02 ccw(c2339.02,1624.89) J1.3A@2339.02,1560.02 ; 2293.15,1579.02 cw(c2247.28,1533.15) J1.3A@2312.15,1533.15 ; 2293.15,1579.02 ccw(c2339.02,1624.89) J1.3A@2339.02,1560.02 ; 2293.15,1579.02 cw(c2247.28,1533.15) J1.3A@2312.15,1533.15 ; 2309.95,1562.22 cw(c2280.88,1533.15) J1.3A@2321.99,1533.15 ; 2309.95,1562.22 ccw(c2339.02,1591.29) J1.3A@2339.02,1550.18 ; 2309.95,1562.22 ccw(c2339.02,1591.29) J1.3A@2339.02,1550.18 ; 2309.95,1562.22 cw(c2280.88,1533.15) J1.3A@2321.99,1533.15 ; 2309.95,1562.22 ccw(c2339.02,1591.29) J1.3A@2339.02,1550.18 ; 2309.95,1562.22 cw(c2280.88,1533.15) J1.3A@2321.99,1533.15
  Top Layer w50: 2108.64,3323.64 P2.2@2339.6,3323.64
  Bottom Layer w20: v1(3230,1440) S3.5@3230,1610 S3.6@3330,1610 S3.7@3430,1610 S3.8@3530,1610 ; v1(3671.14,1472.69) 3703.83,1440 3850,1440 3875,1465 3890,1465 3890,1622.32 3881.57,1630.75 v1@3881.57,1895 ; v1(3690,1925) 3860,1925 3881.57,1903.43 v1@3881.57,2181.57 ; R18.2@3867.77,1616.94 cw(c3814.09,1563.26) 3890,1563.26 ; R17.2@4231.16,1611.16 4295,1675 v1(4295,1880) ; v2(4410,1945) 4470,1945 4525,2000 4525,2160 4560,2195 P6.2@4635,2195 ; v1(4431.14,2397.69) 4431.14,2548.86 ; S3.5@3216.19,1596.19 cw(c3182.86,1562.86) 3230,1562.86 ; S3.5@3216.19,1596.19 cw(c3182.86,1562.86) 3230,1562.86 ; S3.5@3216.19,1596.19 cw(c3182.86,1562.86) 3230,1562.86 ; v1@3223.15,1446.85 ccw(c3206.62,1463.38) 3230,1463.38 ; v1@3223.15,1446.85 ccw(c3206.62,1463.38) 3230,1463.38 ; v1@3223.15,1446.85 ccw(c3206.62,1463.38) 3230,1463.38 ; 3230,1463.38 ccw(c3253.38,1463.38) v1@3236.85,1446.85 ; 3230,1463.38 ccw(c3253.38,1463.38) v1@3236.85,1446.85 ; 3230,1463.38 ccw(c3253.38,1463.38) v1@3236.85,1446.85 ; 3230,1562.86 cw(c3277.14,1562.86) S3.5@3243.81,1596.19 ; 3230,1562.86 cw(c3277.14,1562.86) S3.5@3243.81,1596.19 ; 3230,1562.86 cw(c3277.14,1562.86) S3.5@3243.81,1596.19 ; S3.5@3243.81,1596.19 cw(c3277.14,1562.86) 3277.14,1610 ; S3.5@3243.81,1596.19 cw(c3277.14,1562.86) 3277.14,1610 ; S3.5@3243.81,1596.19 cw(c3277.14,1562.86) 3277.14,1610 ; S3.5@3243.81,1623.81 ccw(c3277.14,1657.14) 3277.14,1610 ; S3.5@3243.81,1623.81 ccw(c3277.14,1657.14) 3277.14,1610 ; S3.5@3243.81,1623.81 ccw(c3277.14,1657.14) 3277.14,1610 ; 3282.86,1610 cw(c3282.86,1562.86) S3.6@3316.19,1596.19 ; 3282.86,1610 ccw(c3282.86,1657.14) S3.6@3316.19,1623.81 ; 3282.86,1610 ccw(c3282.86,1657.14) S3.6@3316.19,1623.81 ; 3282.86,1610 cw(c3282.86,1562.86) S3.6@3316.19,1596.19 ; 3282.86,1610 ccw(c3282.86,1657.14) S3.6@3316.19,1623.81 ; 3282.86,1610 cw(c3282.86,1562.86) S3.6@3316.19,1596.19 ; S3.6@3343.81,1596.19 cw(c3377.14,1562.86) 3377.14,1610 ; S3.6@3343.81,1596.19 cw(c3377.14,1562.86) 3377.14,1610 ; S3.6@3343.81,1596.19 cw(c3377.14,1562.86) 3377.14,1610 ; S3.6@3343.81,1623.81 ccw(c3377.14,1657.14) 3377.14,1610 ; S3.6@3343.81,1623.81 ccw(c3377.14,1657.14) 3377.14,1610 ; S3.6@3343.81,1623.81 ccw(c3377.14,1657.14) 3377.14,1610 ; 3382.86,1610 cw(c3382.86,1562.86) S3.7@3416.19,1596.19 ; 3382.86,1610 ccw(c3382.86,1657.14) S3.7@3416.19,1623.81 ; 3382.86,1610 ccw(c3382.86,1657.14) S3.7@3416.19,1623.81 ; 3382.86,1610 cw(c3382.86,1562.86) S3.7@3416.19,1596.19 ; 3382.86,1610 ccw(c3382.86,1657.14) S3.7@3416.19,1623.81 ; 3382.86,1610 cw(c3382.86,1562.86) S3.7@3416.19,1596.19 ; S3.7@3443.81,1596.19 cw(c3477.14,1562.86) 3477.14,1610 ; S3.7@3443.81,1596.19 cw(c3477.14,1562.86) 3477.14,1610 ; S3.7@3443.81,1596.19 cw(c3477.14,1562.86) 3477.14,1610 ; S3.7@3443.81,1623.81 ccw(c3477.14,1657.14) 3477.14,1610 ; S3.7@3443.81,1623.81 ccw(c3477.14,1657.14) 3477.14,1610 ; S3.7@3443.81,1623.81 ccw(c3477.14,1657.14) 3477.14,1610 ; 3482.86,1610 cw(c3482.86,1562.86) S3.8@3516.19,1596.19 ; 3482.86,1610 ccw(c3482.86,1657.14) S3.8@3516.19,1623.81 ; 3482.86,1610 ccw(c3482.86,1657.14) S3.8@3516.19,1623.81 ; 3482.86,1610 cw(c3482.86,1562.86) S3.8@3516.19,1596.19 ; 3482.86,1610 ccw(c3482.86,1657.14) S3.8@3516.19,1623.81 ; 3482.86,1610 cw(c3482.86,1562.86) S3.8@3516.19,1596.19 ; v1@3671.14,1463 cw(c3671.14,1439.62) 3687.68,1456.15 ; v1@3671.14,1463 cw(c3671.14,1439.62) 3687.68,1456.15 ; v1@3671.14,1463 cw(c3671.14,1439.62) 3687.68,1456.15 ; v1@3680.83,1472.69 ccw(c3704.21,1472.69) 3687.68,1456.15 ; v1@3680.83,1472.69 ccw(c3704.21,1472.69) 3687.68,1456.15 ; v1@3680.83,1472.69 ccw(c3704.21,1472.69) 3687.68,1456.15 ; v1@3696.85,1918.15 cw(c3713.38,1901.62) 3713.38,1925 ; v1@3696.85,1918.15 cw(c3713.38,1901.62) 3713.38,1925 ; v1@3696.85,1918.15 cw(c3713.38,1901.62) 3713.38,1925 ; v1@3696.85,1931.85 ccw(c3713.38,1948.38) 3713.38,1925 ; v1@3696.85,1931.85 ccw(c3713.38,1948.38) 3713.38,1925 ; v1@3696.85,1931.85 ccw(c3713.38,1948.38) 3713.38,1925 ; 3842.5,1432.5 cw(c3868.09,1406.91) P1.5@3879.07,1441.39 ; 3842.5,1432.5 cw(c3868.09,1406.91) P1.5@3879.07,1441.39 ; 3842.5,1432.5 cw(c3868.09,1406.91) P1.5@3879.07,1441.39 ; P1.5@3871.19,1473.81 ccw(c3825.79,1519.21) 3890,1519.21 ; P1.5@3871.19,1473.81 ccw(c3825.79,1519.21) 3890,1519.21 ; P1.5@3871.19,1473.81 ccw(c3825.79,1519.21) 3890,1519.21 ; 3873.47,1911.53 cw(c3856.93,1895) v1@3880.32,1895 ; 3873.47,1911.53 ccw(c3890,1928.07) v1@3890,1904.69 ; 3873.47,1911.53 ccw(c3890,1928.07) v1@3890,1904.69 ; 3873.47,1911.53 cw(c3856.93,1895) v1@3880.32,1895 ; 3873.47,1911.53 ccw(c3890,1928.07) v1@3890,1904.69 ; 3873.47,1911.53 cw(c3856.93,1895) v1@3880.32,1895 ; 3881.57,1662.89 cw(c3834.43,1662.89) 3867.77,1629.56 ccw(c3834.43,1662.89) 3881.57,1662.89 ; 3881.57,1662.89 ccw(c3928.72,1662.89) 3895.38,1629.56 cw(c3928.72,1662.89) 3881.57,1662.89 ; 3881.57,1851.28 cw(c3933.72,1851.28) v1@3896.85,1888.15 ; 3881.57,1851.28 cw(c3933.72,1851.28) v1@3896.85,1888.15 ; 3881.57,1851.28 cw(c3933.72,1851.28) v1@3896.85,1888.15 ; 3881.57,1938.72 ccw(c3933.72,1938.72) v1@3896.85,1901.85 ; 3881.57,1938.72 ccw(c3933.72,1938.72) v1@3896.85,1901.85 ; 3881.57,1938.72 ccw(c3933.72,1938.72) v1@3896.85,1901.85 ; 3881.57,2153.35 cw(c3916.65,2153.35) v1@3891.85,2178.15 ; 3881.57,2153.35 cw(c3916.65,2153.35) v1@3891.85,2178.15 ; 3881.57,2153.35 cw(c3916.65,2153.35) v1@3891.85,2178.15 ; 3890,1495.07 ccw(c3920.07,1495.07) P1.5@3898.81,1473.81 ; 3890,1495.07 ccw(c3920.07,1495.07) P1.5@3898.81,1473.81 ; 3890,1495.07 ccw(c3920.07,1495.07) P1.5@3898.81,1473.81 ; v1@4288.15,1873.15 cw(c4271.62,1856.62) 4295,1856.62 ; v1@4288.15,1873.15 cw(c4271.62,1856.62) 4295,1856.62 ; v1@4288.15,1873.15 cw(c4271.62,1856.62) 4295,1856.62 ; 4295,1856.62 cw(c4318.38,1856.62) v1@4301.85,1873.15 ; 4295,1856.62 cw(c4318.38,1856.62) v1@4301.85,1873.15 ; 4295,1856.62 cw(c4318.38,1856.62) v1@4301.85,1873.15 ; v1@4424.29,2404.54 ccw(c4407.76,2421.07) 4431.14,2421.07 ; v1@4424.29,2404.54 ccw(c4407.76,2421.07) 4431.14,2421.07 ; v1@4424.29,2404.54 ccw(c4407.76,2421.07) 4431.14,2421.07 ; 4431.14,2421.07 ccw(c4454.52,2421.07) v1@4437.99,2404.54 ; 4431.14,2421.07 ccw(c4454.52,2421.07) v1@4437.99,2404.54 ; 4431.14,2421.07 ccw(c4454.52,2421.07) v1@4437.99,2404.54 ; 4587.86,2195 cw(c4587.86,2147.86) P6.2@4621.19,2181.19 ; 4587.86,2195 ccw(c4587.86,2242.14) P6.2@4621.19,2208.81 ; 4587.86,2195 ccw(c4587.86,2242.14) P6.2@4621.19,2208.81 ; 4587.86,2195 cw(c4587.86,2147.86) P6.2@4621.19,2181.19 ; 4587.86,2195 ccw(c4587.86,2242.14) P6.2@4621.19,2208.81 ; 4587.86,2195 cw(c4587.86,2147.86) P6.2@4621.19,2181.19 ; R18.2@3867.77,1601.94 cw(c3814.09,1548.26) 3890,1548.26 ccw(c3814.09,1548.26) R18.2@3867.77,1601.94 ; R17.2@4231.57,1630.28 ccw(c4231.57,1675.42) 4263.5,1643.5 cw(c4231.57,1675.42) R17.2@4231.57,1630.28 ; R17.2@4251.1,1610.75 cw(c4300.24,1610.75) 4265.49,1645.49 ccw(c4300.24,1610.75) R17.2@4251.1,1610.75
  Bottom Layer w25: v1(2030,2575) 2285,2575 2460,2400 2460,2075 ; 2475,1975 2500,2000 2610,2000 2815,2000 2925,2110 v1@2925,2315 ; v1(3290.88,2290) 3785,2290 v1(3815,2260) ; v1(4040,2550) v1@4511.83,2550 ; 2925,2280.58 cw(c2959.42,2280.58) v1@2935.08,2304.92 ; 2925,2280.58 cw(c2959.42,2280.58) v1@2935.08,2304.92 ; 2925,2280.58 cw(c2959.42,2280.58) v1@2935.08,2304.92 ; 4228.21,2550 cw(c4228.21,2524.76) v1@4246.06,2542.61 ; 4228.21,2550 cw(c4228.21,2524.76) v1@4246.06,2542.61 ; 4228.21,2550 cw(c4228.21,2524.76) v1@4246.06,2542.61 ; v1@4256.22,2542.61 cw(c4274.07,2524.76) 4274.07,2550 ; v1@4256.22,2542.61 cw(c4274.07,2524.76) 4274.07,2550 ; v1@4256.22,2542.61 cw(c4274.07,2524.76) 4274.07,2550 ; 4485.56,2550 cw(c4485.56,2511.1) v1@4513.06,2538.61 ; 4485.56,2550 cw(c4485.56,2511.1) v1@4513.06,2538.61 ; 4485.56,2550 cw(c4485.56,2511.1) v1@4513.06,2538.61
  Bottom Layer w50: P2.2@2339.6,3323.64 2339.6,3474.6 2415,3550 2885,3550 2944.6,3490.4 P3.2@2944.6,3328.64 ; 2610,2000 v1(2695,1915)
  Bottom Layer w100: J1.2B@2260.28,1769.37 J1.2B@2280.91,1790 ; 2475,1975 2355,1855 2355,1790 J1.2B@2280.91,1790 ; J1.2A@2239.8,1690.61 cw(c2380.12,1690.77) J1.2B@2280.9,1790 ; J1.2A@2239.8,1690.61 cw(c2380.12,1690.77) J1.2B@2280.9,1790 ; J1.2A@2239.8,1690.61 cw(c2380.12,1690.77) J1.2B@2280.9,1790 ; J1.2A@2240.99,1683.76 cw(c2318.33,1711.32) J1.2B@2260.28,1769.37 ; J1.2A@2240.99,1683.76 cw(c2318.33,1711.32) J1.2B@2260.28,1769.37 ; J1.2A@2240.99,1683.76 cw(c2318.33,1711.32) J1.2B@2260.28,1769.37 ; 2311.62,1790 cw(c2311.62,1726.62) 2356.44,1771.44 ; 2311.62,1790 cw(c2311.62,1726.62) 2356.44,1771.44 ; 2311.62,1790 cw(c2311.62,1726.62) 2356.44,1771.44 ; 2355,1777.17 ccw(c2367.17,1777.17) 2358.56,1768.56 ; 2355,1777.17 ccw(c2367.17,1777.17) 2358.56,1768.56 ; 2355,1777.17 ccw(c2367.17,1777.17) 2358.56,1768.56 ; 2355,1802.83 cw(c2367.17,1802.83) 2358.56,1811.44 ; 2355,1802.83 cw(c2367.17,1802.83) 2358.56,1811.44 ; 2355,1802.83 cw(c2367.17,1802.83) 2358.56,1811.44 ; 2356.62,1790 cw(c2356.62,1726.62) 2401.44,1771.44 ; 2356.62,1790 cw(c2356.62,1726.62) 2401.44,1771.44 ; 2356.62,1790 cw(c2356.62,1726.62) 2401.44,1771.44 ; 2356.62,1790 cw(c2356.62,1726.62) 2401.44,1771.44 ; 2356.62,1790 cw(c2356.62,1726.62) 2401.44,1771.44 ; 2356.62,1790 cw(c2356.62,1726.62) 2401.44,1771.44
  other v1: 2335,1750 2380,1750 2335,1790 2380,1790 3890,1895 2615,2045 3815,2185 3885,2185 3955,2185 3885,2260 3955,2260 2930,2310 4251.14,2547.69
GND1: P4.4 R2.1 R4.1 R6.1 | length 1908.4
  Top Layer w25: R4.1@3368.86,3057.31 3368.86,3173.86 3425.85,3230.85 3613.86,3230.85 R6.1@3613.86,3057.31 ; P4.4@3628.97,3245.96 3628.97,3156.03 3648.86,3136.14 3878.86,3136.14 R2.1@3878.86,3057.31 ; R4.1@3360.02,3066.15 ccw(c3338.68,3087.49) 3368.86,3087.49 ; R4.1@3360.02,3066.15 ccw(c3338.68,3087.49) 3368.86,3087.49 ; R4.1@3360.02,3066.15 ccw(c3338.68,3087.49) 3368.86,3087.49 ; 3368.86,3087.49 ccw(c3399.04,3087.49) R4.1@3377.7,3066.15 ; 3368.86,3087.49 ccw(c3399.04,3087.49) R4.1@3377.7,3066.15 ; 3368.86,3087.49 ccw(c3399.04,3087.49) R4.1@3377.7,3066.15 ; 3565.64,3230.85 ccw(c3565.64,3309.29) P4.4@3621.1,3253.83 ; 3565.64,3230.85 ccw(c3565.64,3309.29) P4.4@3621.1,3253.83 ; 3565.64,3230.85 ccw(c3565.64,3309.29) P4.4@3621.1,3253.83 ; R6.1@3605.02,3066.15 ccw(c3583.68,3087.49) 3613.86,3087.49 ; R6.1@3605.02,3066.15 ccw(c3583.68,3087.49) 3613.86,3087.49 ; R6.1@3605.02,3066.15 ccw(c3583.68,3087.49) 3613.86,3087.49 ; 3613.86,3087.49 ccw(c3644.04,3087.49) R6.1@3622.7,3066.15 ; 3613.86,3087.49 ccw(c3644.04,3087.49) R6.1@3622.7,3066.15 ; 3613.86,3087.49 ccw(c3644.04,3087.49) R6.1@3622.7,3066.15 ; 3613.86,3182.63 cw(c3692.3,3182.63) P4.4@3636.83,3238.1 ; 3613.86,3182.63 cw(c3692.3,3182.63) P4.4@3636.83,3238.1 ; 3613.86,3182.63 cw(c3692.3,3182.63) P4.4@3636.83,3238.1 ; P4.4@3621.1,3238.1 cw(c3602.12,3219.11) 3628.97,3219.11 ; P4.4@3621.1,3238.1 cw(c3602.12,3219.11) 3628.97,3219.11 ; P4.4@3621.1,3238.1 cw(c3602.12,3219.11) 3628.97,3219.11 ; 3628.97,3219.11 cw(c3655.82,3219.11) P4.4@3636.83,3238.1 ; 3628.97,3219.11 cw(c3655.82,3219.11) P4.4@3636.83,3238.1 ; 3628.97,3219.11 cw(c3655.82,3219.11) P4.4@3636.83,3238.1 ; R2.1@3870.02,3061.15 ccw(c3848.68,3082.49) 3878.86,3082.49 ; R2.1@3870.02,3061.15 ccw(c3848.68,3082.49) 3878.86,3082.49 ; R2.1@3870.02,3061.15 ccw(c3848.68,3082.49) 3878.86,3082.49 ; 3878.86,3082.49 ccw(c3909.04,3082.49) R2.1@3887.7,3061.15 ; 3878.86,3082.49 ccw(c3909.04,3082.49) R2.1@3887.7,3061.15 ; 3878.86,3082.49 ccw(c3909.04,3082.49) R2.1@3887.7,3061.15
GND2: D1.1 D2.1 D4.1 P5.4 U5.3 U6.3 U7.3 | length 723.1
  Top Layer w25: 4170,2940 4170,2855 4380,2855 ; U6.3@4380,2957.4 4380,2855 ; U5.3@4615,2957.4 4615,2875 4595,2855 4380,2855
  other v1: 4130,3035 4185,3035 4130,3085 4185,3085
IN1: R1.2 U1.42 U2.4 | length 620.8
  Top Layer w10: R1.2@3878.14,2553.69 3878.14,2510.9 ; U1.42@3893.92,2390 3893.92,2495.12 3878.14,2510.9 ; R1.2@3865.31,2538.34 cw(c3842.38,2510.9) 3878.14,2510.9 ; R1.2@3865.31,2538.34 cw(c3842.38,2510.9) 3878.14,2510.9 ; R1.2@3865.31,2538.34 cw(c3842.38,2510.9) 3878.14,2510.9 ; 3878.14,2510.9 cw(c3913.91,2510.9) R1.2@3890.97,2538.34 ; 3878.14,2510.9 cw(c3913.91,2510.9) R1.2@3890.97,2538.34 ; 3878.14,2510.9 cw(c3913.91,2510.9) R1.2@3890.97,2538.34 ; 3893.92,2455.15 ccw(c3902.18,2455.15) U1.42@3896.34,2449.3 ; 3893.92,2455.15 ccw(c3902.18,2455.15) U1.42@3896.34,2449.3 ; 3893.92,2455.15 ccw(c3902.18,2455.15) U1.42@3896.34,2449.3
  Top Layer w25: R1.2@3892,2567.55 U2.4@3892,2668.6 ; R1.2@3874.3,2562.53 ccw(c3831.58,2605.25) 3892,2605.25 ; R1.2@3874.3,2562.53 ccw(c3831.58,2605.25) 3892,2605.25 ; R1.2@3874.3,2562.53 ccw(c3831.58,2605.25) 3892,2605.25
IN2: R3.1 U1.45 U3.4 | length 1135.3
  Top Layer w10: R3.1@3380.86,2553.31 3440.36,2493.81 3645,2493.81 3650.81,2488 3816.04,2488 3836.65,2467.4 U1.45@3836.65,2390 ; R3.1@3385.86,2533.31 cw(c3385.86,2497.1) 3411.46,2522.71 ; R3.1@3385.86,2533.31 cw(c3385.86,2497.1) 3411.46,2522.71 ; R3.1@3385.86,2533.31 cw(c3385.86,2497.1) 3411.46,2522.71 ; R3.1@3395.86,2553.31 ccw(c3432.07,2553.31) 3406.46,2527.71 ; R3.1@3395.86,2553.31 ccw(c3432.07,2553.31) 3406.46,2527.71 ; R3.1@3395.86,2553.31 ccw(c3432.07,2553.31) 3406.46,2527.71 ; R3.1@3405.86,2553.31 ccw(c3466.21,2553.31) 3423.54,2510.64 ; R3.1@3405.86,2553.31 ccw(c3466.21,2553.31) 3423.54,2510.64 ; R3.1@3405.86,2553.31 ccw(c3466.21,2553.31) 3423.54,2510.64
  Top Layer w25: R3.1@3377,2557.17 U3.4@3377,2668.6 ; R3.1@3367.02,2562.15 ccw(c3342.92,2586.25) 3377,2586.25 ; R3.1@3367.02,2562.15 ccw(c3342.92,2586.25) 3377,2586.25 ; R3.1@3367.02,2562.15 ccw(c3342.92,2586.25) 3377,2586.25 ; 3377,2580.73 ccw(c3403.28,2580.73) R3.1@3384.7,2562.15 ; 3377,2580.73 ccw(c3403.28,2580.73) R3.1@3384.7,2562.15 ; 3377,2580.73 ccw(c3403.28,2580.73) R3.1@3384.7,2562.15
IN3: R5.1 U1.43 U4.4 | length 942.3
  Top Layer w10: R5.1@3625.86,2553.31 3674.17,2505 3860,2505 3876.02,2488.98 U1.43@3876.02,2390 ; R5.1@3630.86,2533.31 cw(c3630.86,2497.1) 3656.46,2522.71 ; R5.1@3630.86,2533.31 cw(c3630.86,2497.1) 3656.46,2522.71 ; R5.1@3630.86,2533.31 cw(c3630.86,2497.1) 3656.46,2522.71 ; R5.1@3640.86,2553.31 ccw(c3677.07,2553.31) 3651.46,2527.71 ; R5.1@3640.86,2553.31 ccw(c3677.07,2553.31) 3651.46,2527.71 ; R5.1@3640.86,2553.31 ccw(c3677.07,2553.31) 3651.46,2527.71 ; R5.1@3650.86,2553.31 ccw(c3711.21,2553.31) 3668.54,2510.64 ; R5.1@3650.86,2553.31 ccw(c3711.21,2553.31) 3668.54,2510.64 ; R5.1@3650.86,2553.31 ccw(c3711.21,2553.31) 3668.54,2510.64
  Top Layer w25: R5.1@3622,2557.17 U4.4@3622,2668.6 ; R5.1@3612.02,2562.15 ccw(c3587.92,2586.25) 3622,2586.25 ; R5.1@3612.02,2562.15 ccw(c3587.92,2586.25) 3622,2586.25 ; R5.1@3612.02,2562.15 ccw(c3587.92,2586.25) 3622,2586.25 ; 3622,2580.73 ccw(c3648.28,2580.73) R5.1@3629.7,2562.15 ; 3622,2580.73 ccw(c3648.28,2580.73) R5.1@3629.7,2562.15 ; 3622,2580.73 ccw(c3648.28,2580.73) R5.1@3629.7,2562.15
J_IN: P4.2 U3.1 | length 833.3
  Bottom Layer w12: v1(3400,2930) 3400,3139.04 P4.2@3589.6,3328.64 ; v1@3390.32,2939.68 ccw(c3366.96,2963.04) 3400,2963.04 ; v1@3390.32,2939.68 ccw(c3366.96,2963.04) 3400,2963.04 ; v1@3390.32,2939.68 ccw(c3366.96,2963.04) 3400,2963.04 ; 3400,2963.04 ccw(c3433.04,2963.04) v1@3409.68,2939.68 ; 3400,2963.04 ccw(c3433.04,2963.04) v1@3409.68,2939.68 ; 3400,2963.04 ccw(c3433.04,2963.04) v1@3409.68,2939.68 ; 3559.52,3298.56 cw(c3589.6,3268.47) P4.2@3589.6,3311.02 ; 3559.52,3298.56 ccw(c3529.43,3328.64) P4.2@3571.98,3328.64 ; 3559.52,3298.56 ccw(c3529.43,3328.64) P4.2@3571.98,3328.64 ; 3559.52,3298.56 cw(c3589.6,3268.47) P4.2@3589.6,3311.02 ; 3559.52,3298.56 ccw(c3529.43,3328.64) P4.2@3571.98,3328.64 ; 3559.52,3298.56 cw(c3589.6,3268.47) P4.2@3589.6,3311.02
J_OUT: U1.40 U6.1 | length 759.6
  Top Layer w10: U1.40@3935.07,2390 3935.07,2469.61 3960.46,2495 4180,2495 4185,2500 4185,2645 4210,2670 U6.1@4280,2670 ; 4244.55,2670 cw(c4244.55,2634.55) U6.1@4269.62,2659.62 ; 4244.55,2670 ccw(c4244.55,2705.45) U6.1@4269.62,2680.38 ; 4244.55,2670 ccw(c4244.55,2705.45) U6.1@4269.62,2680.38 ; 4244.55,2670 cw(c4244.55,2634.55) U6.1@4269.62,2659.62 ; 4244.55,2670 ccw(c4244.55,2705.45) U6.1@4269.62,2680.38 ; 4244.55,2670 cw(c4244.55,2634.55) U6.1@4269.62,2659.62
K_IN: P4.3 U4.1 | length 786.7
  Bottom Layer w12: v1(3610,2930) 3610,3140 3695.96,3225.96 P4.3@3695.96,3245.96 ; v1@3600.32,2939.68 ccw(c3576.96,2963.04) 3610,2963.04 ; v1@3600.32,2939.68 ccw(c3576.96,2963.04) 3610,2963.04 ; v1@3600.32,2939.68 ccw(c3576.96,2963.04) 3610,2963.04 ; 3610,2963.04 ccw(c3643.04,2963.04) v1@3619.68,2939.68 ; 3610,2963.04 ccw(c3643.04,2963.04) v1@3619.68,2939.68 ; 3610,2963.04 ccw(c3643.04,2963.04) v1@3619.68,2939.68 ; 3671.79,3201.79 ccw(c3627.62,3245.96) P4.3@3690.09,3245.96 ; 3671.79,3201.79 ccw(c3627.62,3245.96) P4.3@3690.09,3245.96 ; 3671.79,3201.79 ccw(c3627.62,3245.96) P4.3@3690.09,3245.96 ; 3691.71,3221.71 cw(c3707.71,3205.72) P4.3@3707.71,3228.34 ; 3691.71,3221.71 cw(c3707.71,3205.72) P4.3@3707.71,3228.34 ; 3691.71,3221.71 cw(c3707.71,3205.72) P4.3@3707.71,3228.34 ; 3692.28,3222.28 ccw(c3668.59,3245.96) P4.3@3702.09,3245.96 ; 3692.28,3222.28 ccw(c3668.59,3245.96) P4.3@3702.09,3245.96 ; 3692.28,3222.28 ccw(c3668.59,3245.96) P4.3@3702.09,3245.96
K_OUT: U1.41 U7.1 | length 514.5
  Top Layer w12: U1.41@3915.39,2390 3915.39,2475.39 3940,2500 3940,2625 3985,2670 U7.1@4035,2670 ; 4001.96,2670 cw(c4001.96,2636.96) U7.1@4025.32,2660.32 ; 4001.96,2670 ccw(c4001.96,2703.04) U7.1@4025.32,2679.68 ; 4001.96,2670 ccw(c4001.96,2703.04) U7.1@4025.32,2679.68 ; 4001.96,2670 cw(c4001.96,2636.96) U7.1@4025.32,2660.32 ; 4001.96,2670 ccw(c4001.96,2703.04) U7.1@4025.32,2679.68 ; 4001.96,2670 cw(c4001.96,2636.96) U7.1@4025.32,2660.32
KEY1: S1.1 U1.27 | length 2641.2
  Top Layer w10: S1.1@3072.61,1489.12 3072.61,1517.61 3110,1555 ; U1.27@4015,2189.01 4095.03,2189.01 4160,2124.04 v2(4160,1985) ; v2(4185,1755) 3650,1755 3590,1695 3590,1580 3565,1555 3110,1555 ; S1.1@3067.46,1523.65 ccw(c3067.46,1550.66) 3086.56,1531.56 ; S1.1@3067.46,1523.65 ccw(c3067.46,1550.66) 3086.56,1531.56 ; S1.1@3067.46,1523.65 ccw(c3067.46,1550.66) 3086.56,1531.56 ; S1.1@3071.95,1499.67 cw(c3103.48,1503.55) S1.1@3081.02,1526.02 ; S1.1@3071.95,1499.67 cw(c3103.48,1503.55) S1.1@3081.02,1526.02 ; S1.1@3071.95,1499.67 cw(c3103.48,1503.55) S1.1@3081.02,1526.02 ; S1.1@3081.88,1500.89 cw(c3129.28,1506.73) 3095.51,1540.51 ; S1.1@3081.88,1500.89 cw(c3129.28,1506.73) 3095.51,1540.51 ; S1.1@3081.88,1500.89 cw(c3129.28,1506.73) 3095.51,1540.51 ; S1.1@3091.8,1502.12 cw(c3155.08,1509.91) 3110,1555 ; S1.1@3091.8,1502.12 cw(c3155.08,1509.91) 3110,1555 ; S1.1@3091.8,1502.12 cw(c3155.08,1509.91) 3110,1555 ; U1.27@4075.47,2191.43 ccw(c4081.32,2197.27) 4081.32,2189.01 ; U1.27@4075.47,2191.43 ccw(c4081.32,2197.27) 4081.32,2189.01 ; U1.27@4075.47,2191.43 ccw(c4081.32,2197.27) 4081.32,2189.01 ; v2@4155.18,1989.82 ccw(c4143.56,2001.44) 4160,2001.44 ; v2@4155.18,1989.82 ccw(c4143.56,2001.44) 4160,2001.44 ; v2@4155.18,1989.82 ccw(c4143.56,2001.44) 4160,2001.44 ; 4160,2001.44 ccw(c4176.44,2001.44) v2@4164.82,1989.82 ; 4160,2001.44 ccw(c4176.44,2001.44) v2@4164.82,1989.82 ; 4160,2001.44 ccw(c4176.44,2001.44) v2@4164.82,1989.82 ; 4168.56,1755 cw(c4168.56,1738.56) v2@4180.18,1750.18 ; 4168.56,1755 ccw(c4168.56,1771.44) v2@4180.18,1759.82 ; 4168.56,1755 ccw(c4168.56,1771.44) v2@4180.18,1759.82 ; 4168.56,1755 cw(c4168.56,1738.56) v2@4180.18,1750.18 ; 4168.56,1755 ccw(c4168.56,1771.44) v2@4180.18,1759.82 ; 4168.56,1755 cw(c4168.56,1738.56) v2@4180.18,1750.18
  Bottom Layer w10: v2(4160,1985) 4185,1960 v2(4185,1755) ; v2@4160,1978.19 cw(c4160,1961.75) 4171.63,1973.37 ; v2@4160,1978.19 cw(c4160,1961.75) 4171.63,1973.37 ; v2@4160,1978.19 cw(c4160,1961.75) 4171.63,1973.37 ; v2@4166.81,1985 ccw(c4183.25,1985) 4171.63,1973.37 ; v2@4166.81,1985 ccw(c4183.25,1985) 4171.63,1973.37 ; v2@4166.81,1985 ccw(c4183.25,1985) 4171.63,1973.37 ; v2@4180.18,1759.82 ccw(c4168.56,1771.44) 4185,1771.44 ; v2@4180.18,1759.82 ccw(c4168.56,1771.44) 4185,1771.44 ; v2@4180.18,1759.82 ccw(c4168.56,1771.44) 4185,1771.44 ; 4185,1771.44 ccw(c4201.44,1771.44) v2@4189.82,1759.82 ; 4185,1771.44 ccw(c4201.44,1771.44) v2@4189.82,1759.82 ; 4185,1771.44 ccw(c4201.44,1771.44) v2@4189.82,1759.82